# Altium PCB Power Board.PcbDoc
Units mil, origin at the board's own origin, x right, y up, seen from the top; angles counter-clockwise.
Board outline 3937.01 x 3937.01 mil, 4 copper layers (Top Layer, Ground Plane, Power Plane, Bottom Layer), stack 62.449 mil thick; 114 components, 37 nets, 342 pads, 320 vias.
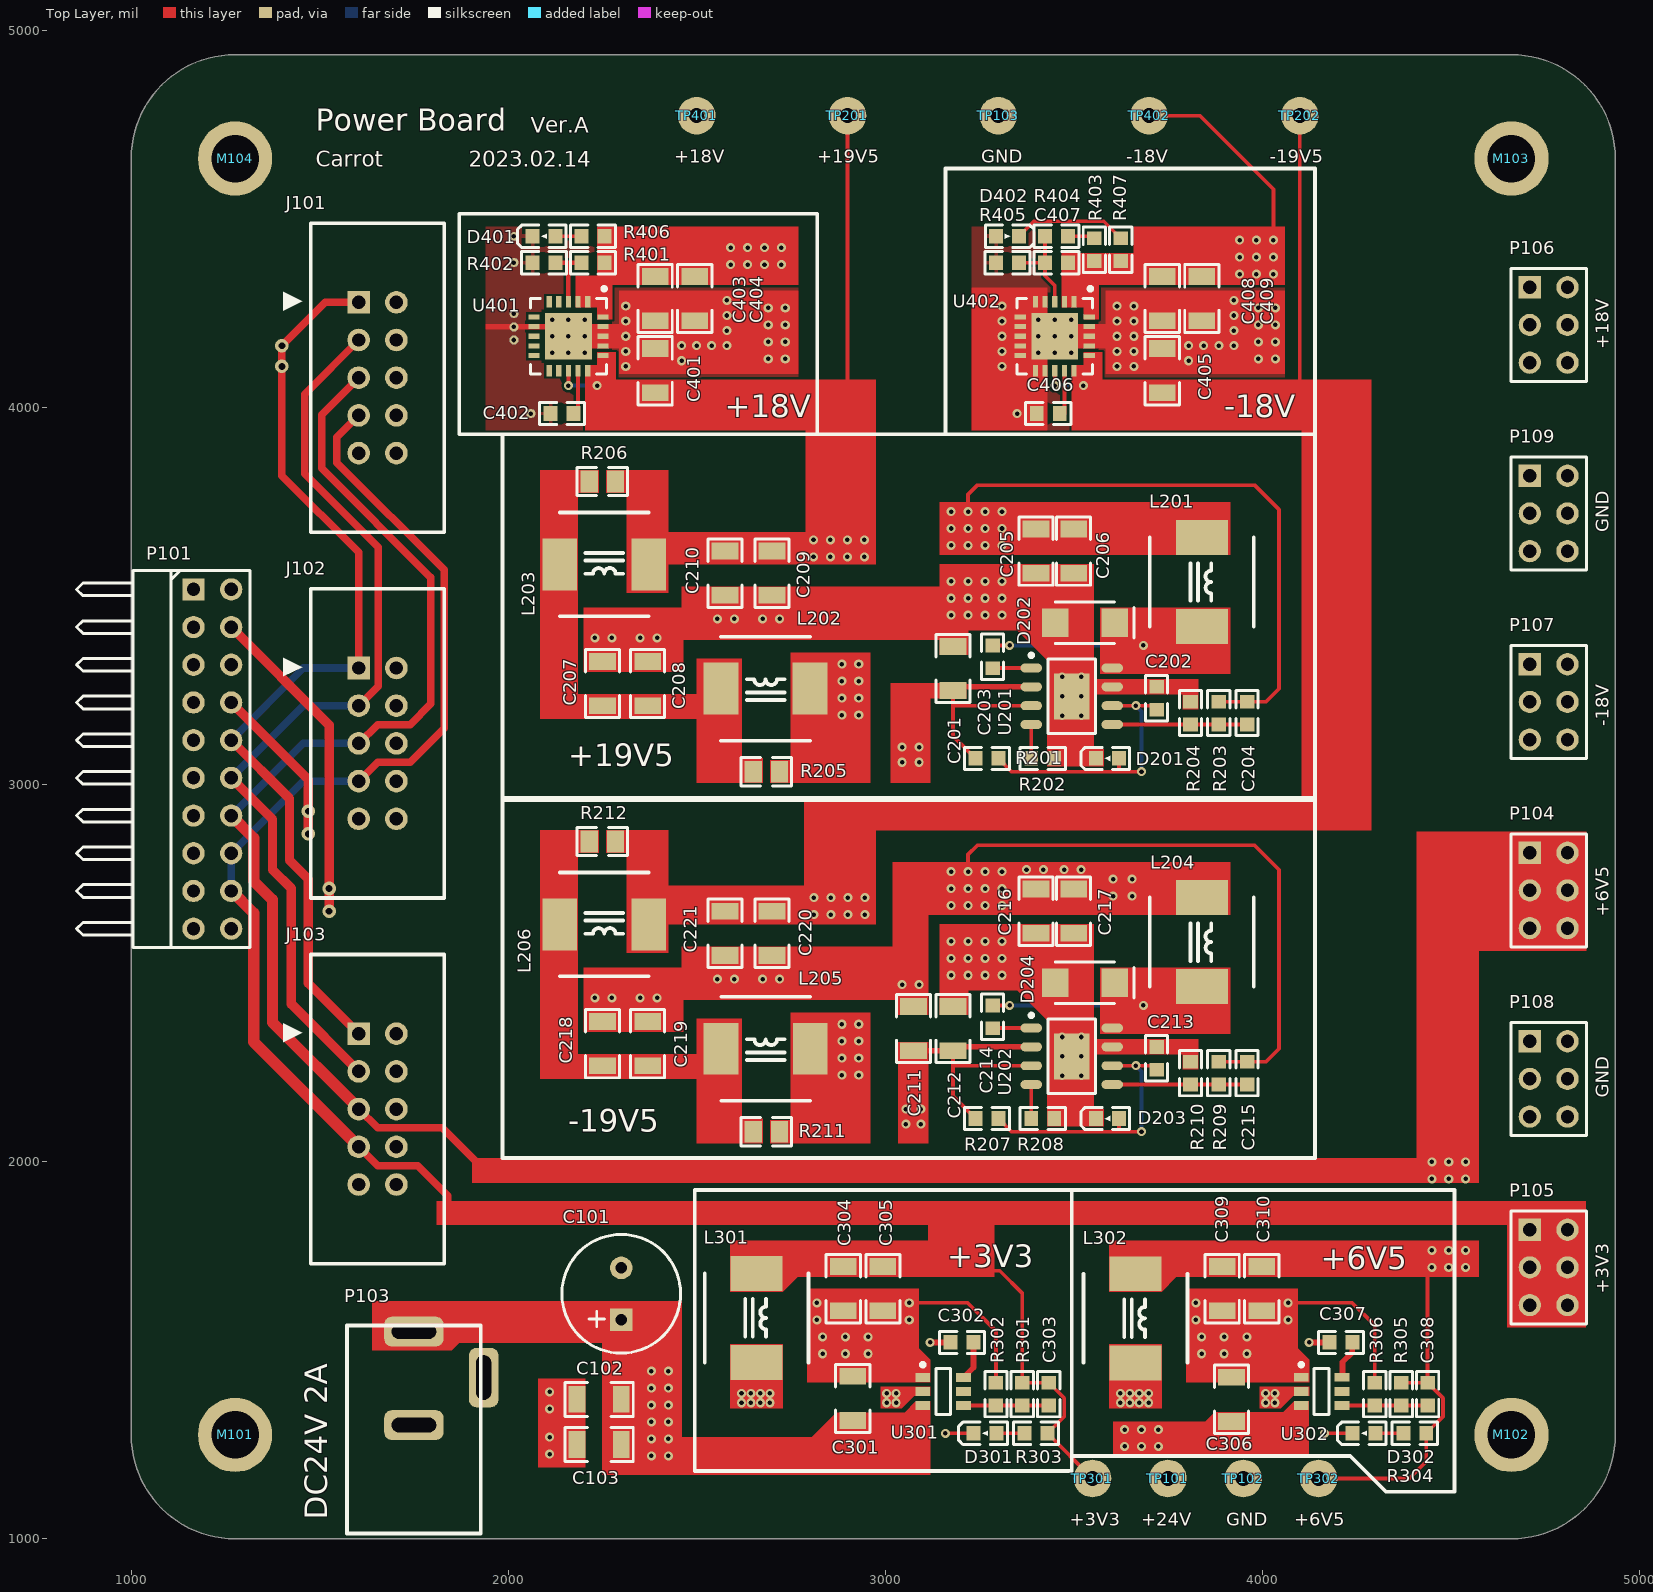
[diagram p0: Top Layer view]
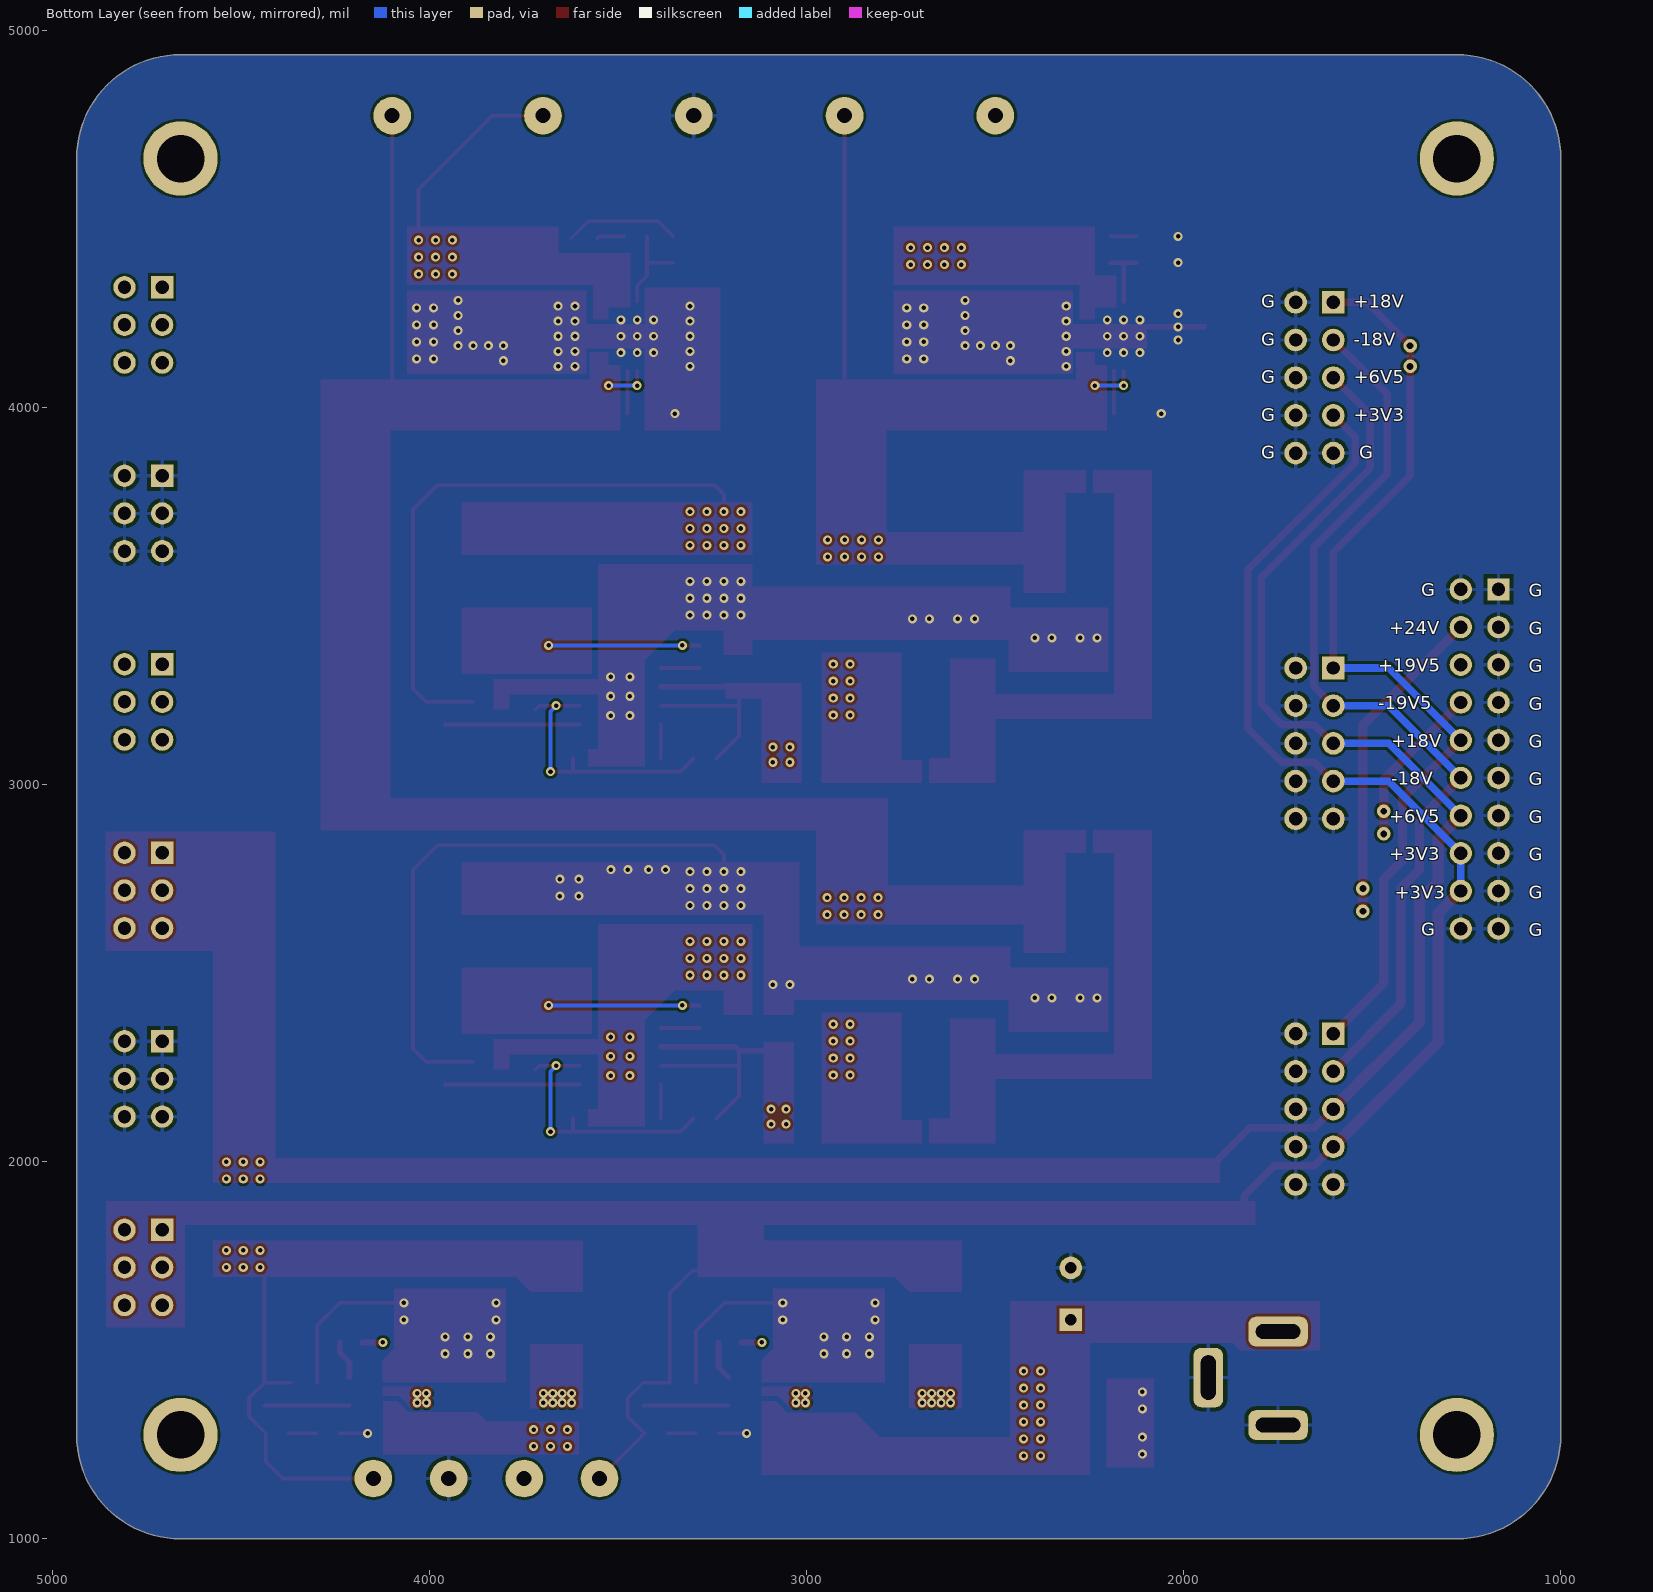
[diagram p1: Bottom Layer view, seen from below]
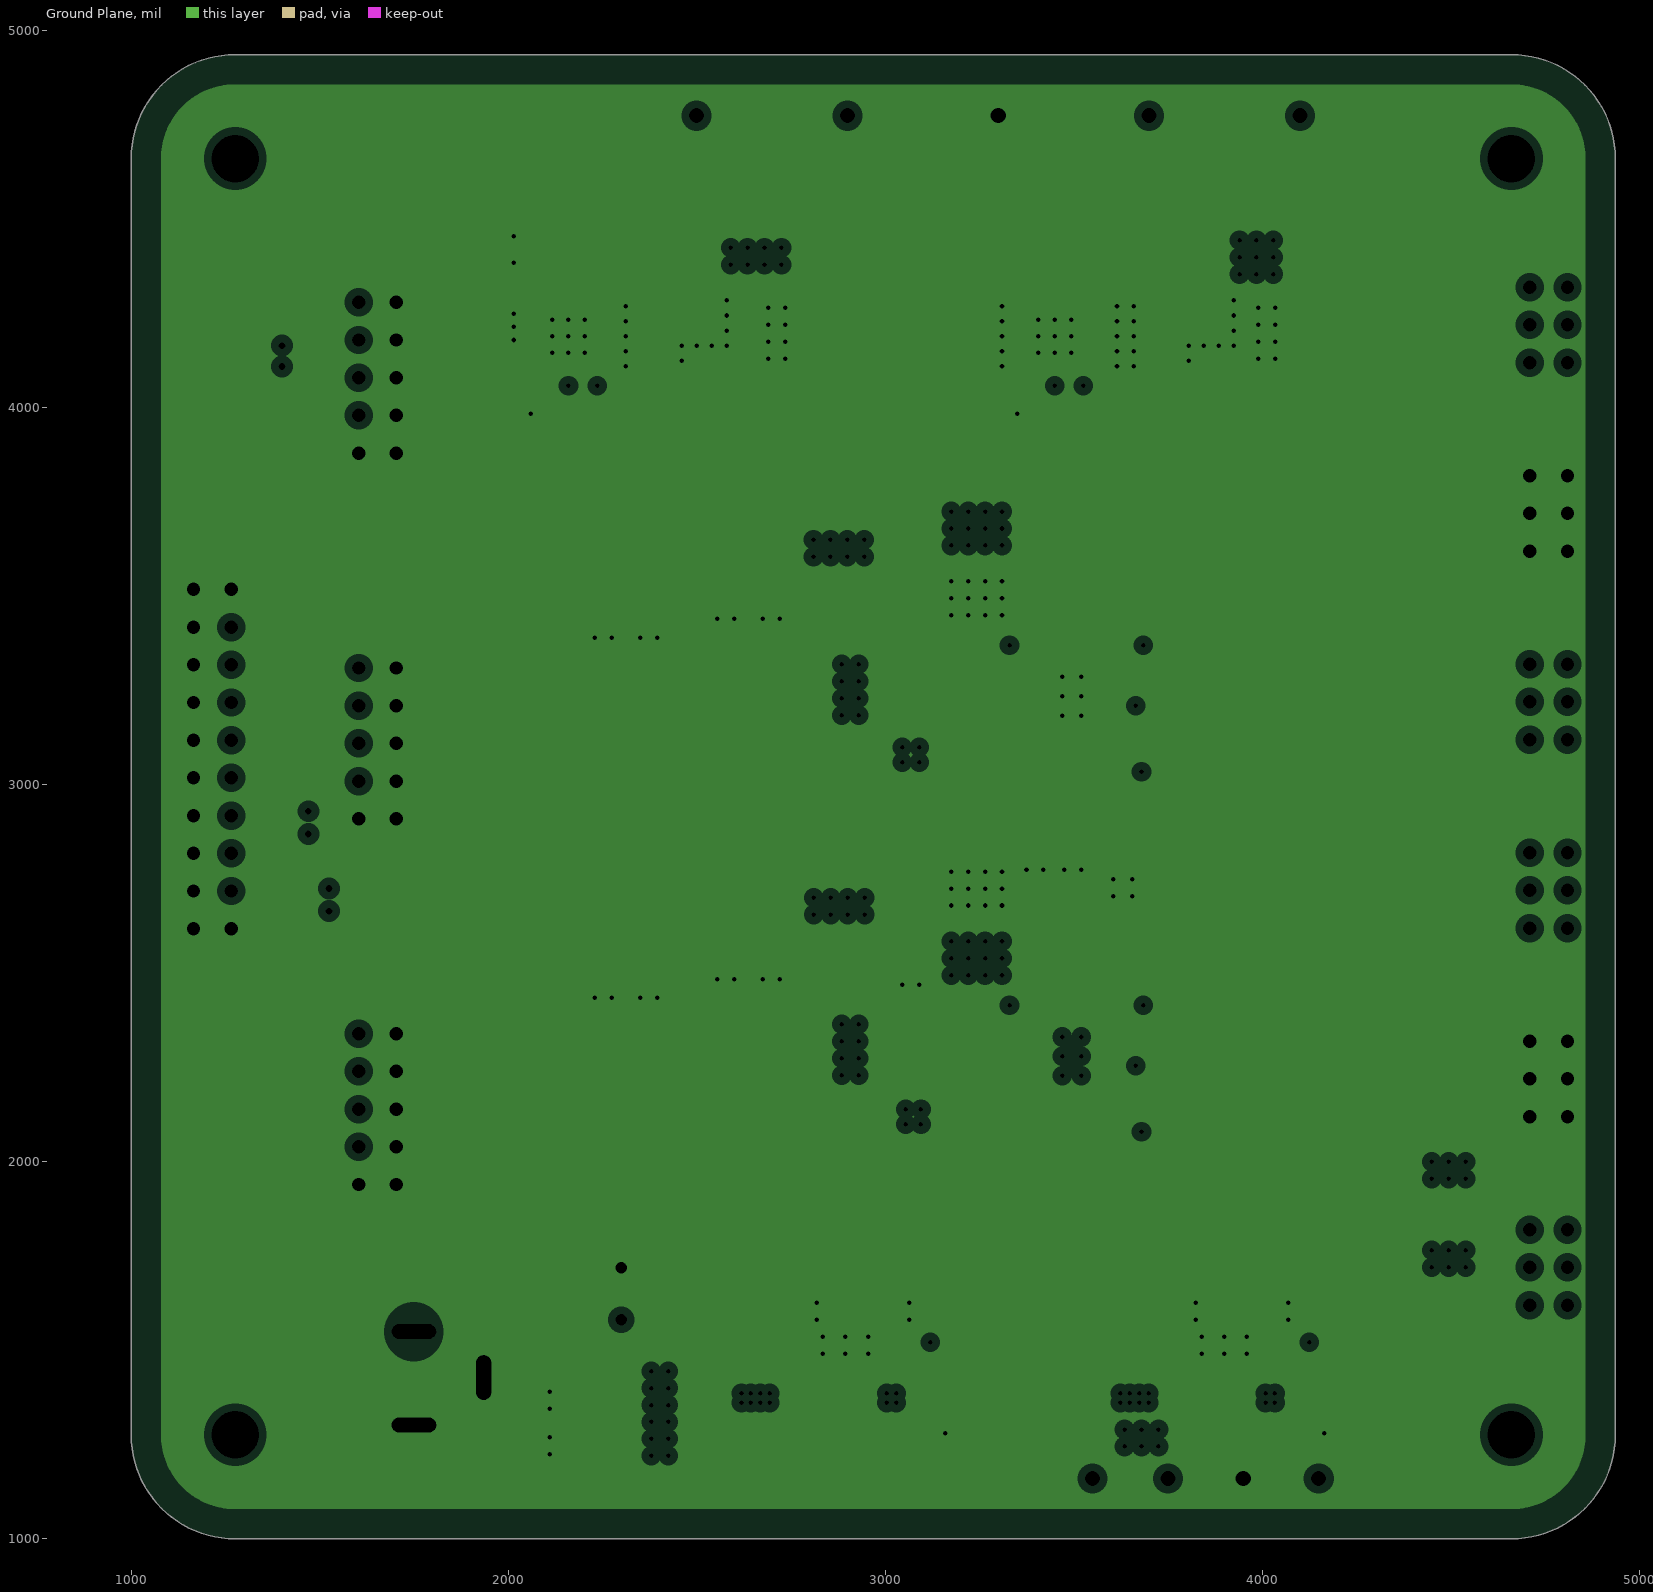
[diagram p2: Ground Plane, clearances drawn from the general rule]
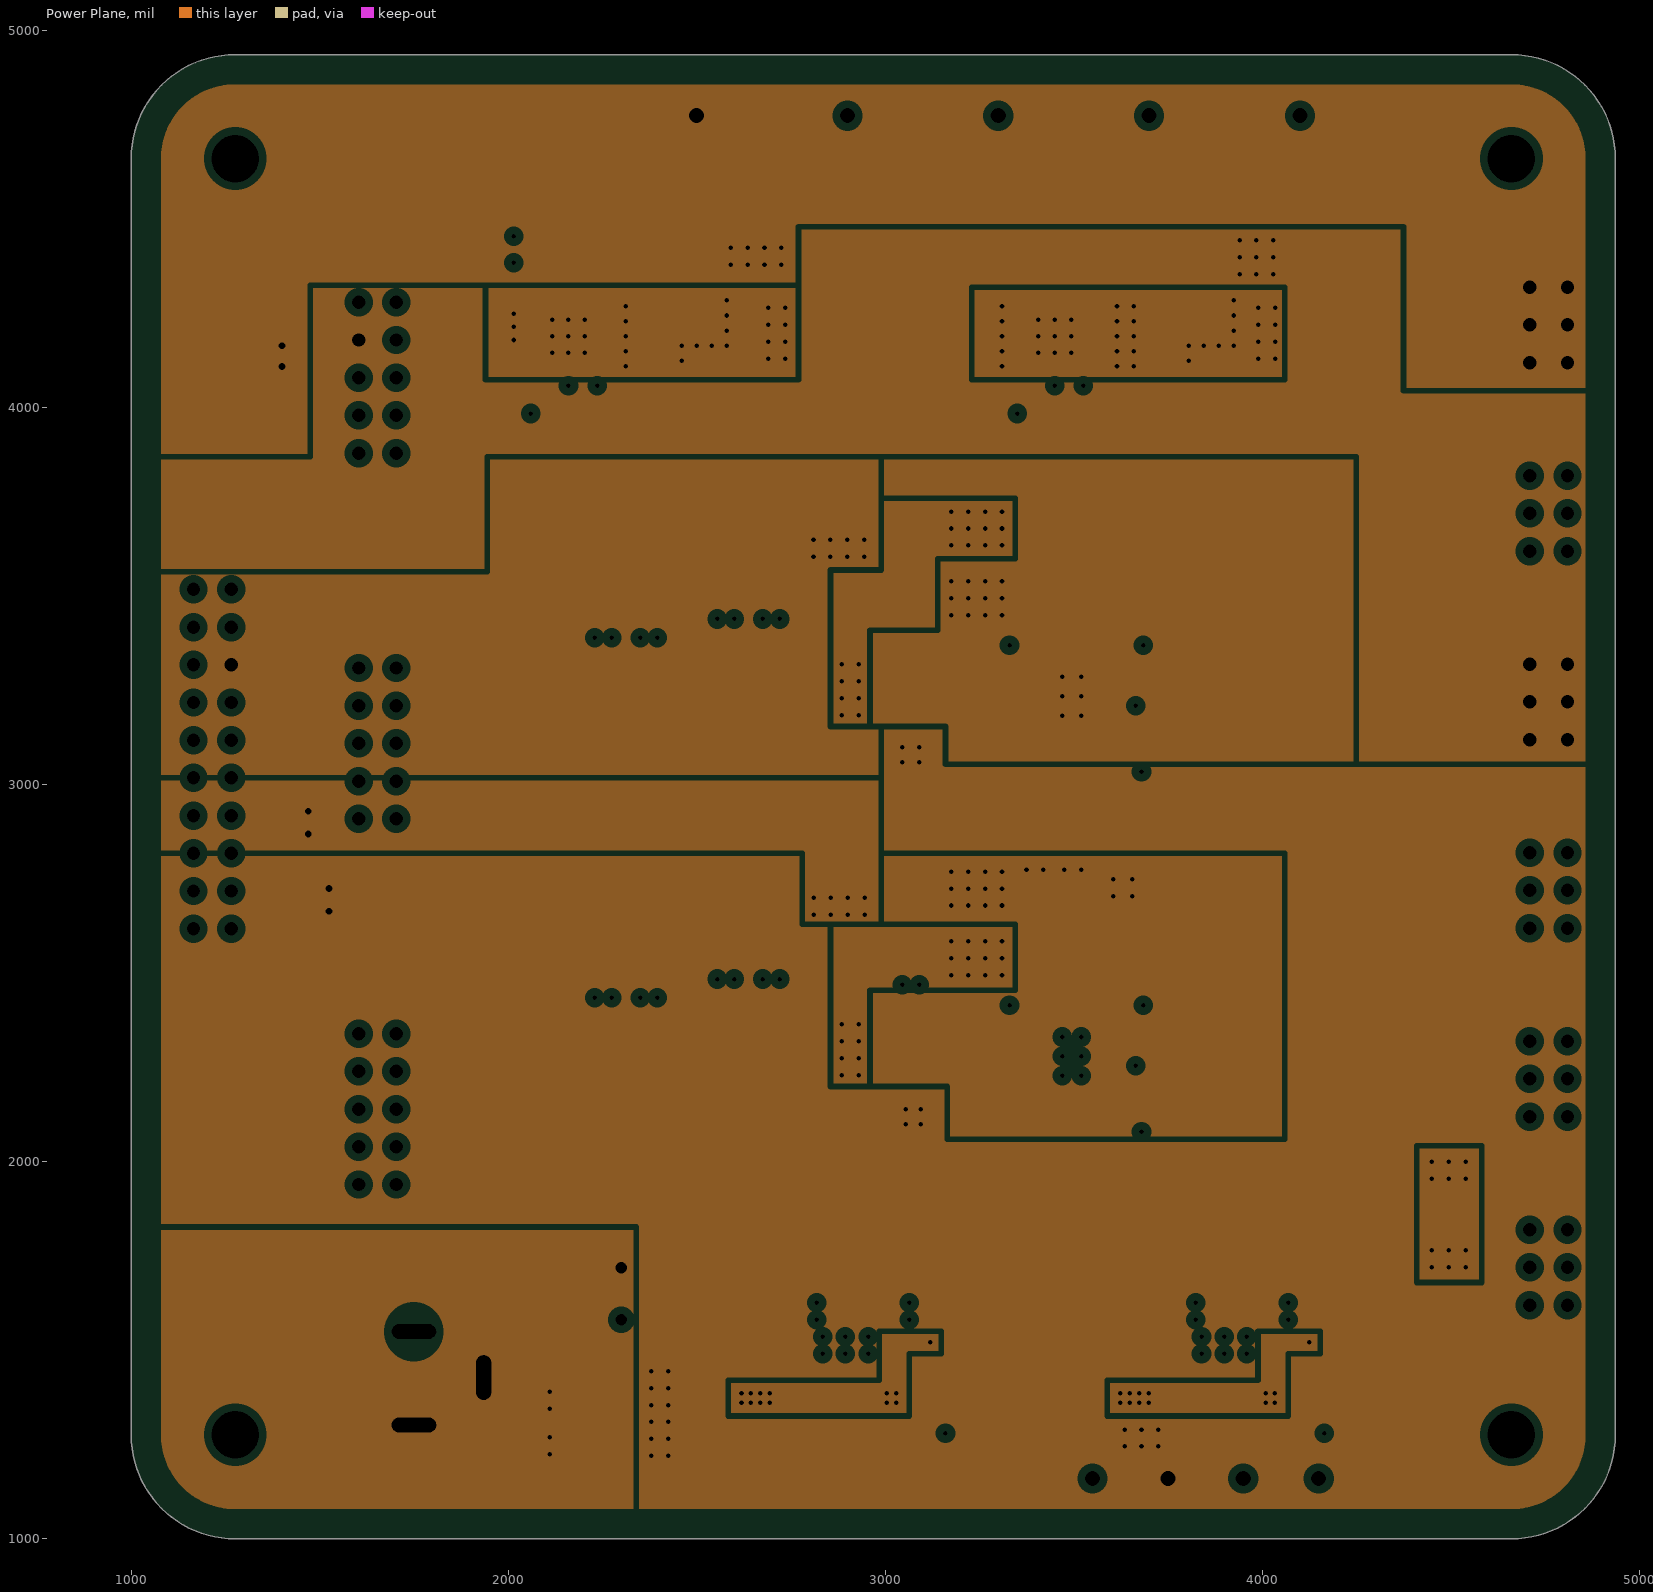
[diagram p3: Power Plane, clearances drawn from the general rule]
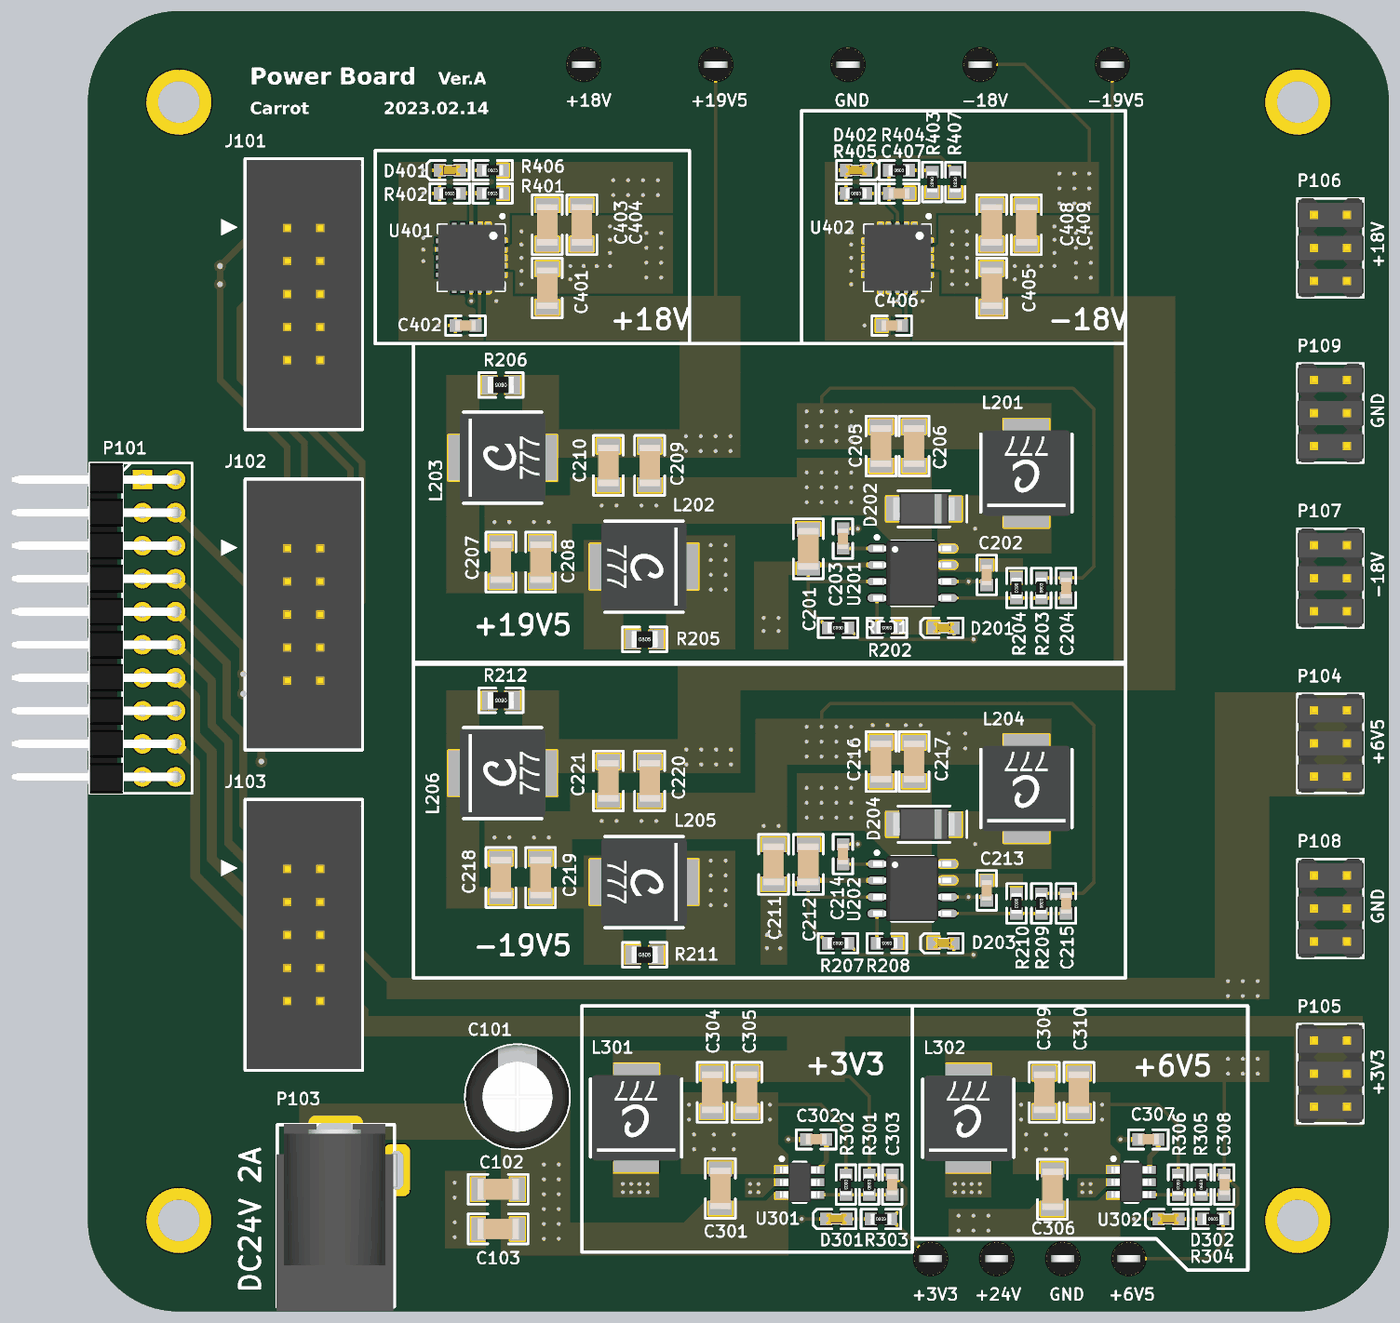
[diagram p4: 3D render of the assembled board from above, using the file's embedded part models]

## Layer stack, top to bottom
Top Solder: solder mask 0.5, Solder Resist, Dk 3.8
Top Layer: signal copper 1.378
Dielectric 1: prepreg 8.2835, 7628, Dk 4.5
Ground Plane: plane copper 0.5984, net GND
Dielectric 3: core 41.9291, FR-4, Dk 4.5
Power Plane: plane copper 0.5984, net (Multiple Nets)
Dielectric 4: prepreg 8.2835, 7628, Dk 4.5
Bottom Layer: signal copper 1.378
Bottom Solder: solder mask 0.5, Solder Resist, Dk 3.8

## Board outline
1000,1275.59 1000,4661.42 cw(c1275.59,4661.42) 1275.59,4937.01 4661.42,4937.01 cw(c4661.42,4661.42) 4937.01,4661.42 4937.01,1275.59 cw(c4661.42,1275.59) 4661.42,1000 1275.59,1000 cw(c1275.59,1275.59)

## Design rules (kind name [scope] priority, off if disabled: settings)
Clearance [All] p1: gap=7 ignorepadtopadclearanceinfootprint=FALSE
ComponentClearance [All] p1: gap=10 collisioncheckmode=3 verticalgap=10 showdistances=TRUE
Height [All] p1: minheight=0 maxheight=500 prefheight=500
HoleSize [All] p1: absolutevalues=TRUE maxlimit=10000 minlimit=10 maxpercent=80.000 minpercent=20.000
PlaneClearance [All] p1: clearance=20
PlaneConnect [All] p1: pad.planeconnectstyle=Relief pad.reliefexpansion=20 pad.reliefentries=4 pad.reliefconductorwidth=10 pad.reliefairgap=10 via.planeconnectstyle=Direct via.reliefexpansion=20 via.reliefentries=4 via.reliefconductorwidth=10 via.reliefairgap=10
PolygonConnect [All] p1: thpad.connectstyle=Relief thpad.reliefconductorwidth=10 thpad.reliefentries=4 thpad.polygonreliefangle="90 Angle" thpad.airgapwidth=10 smdpad.connectstyle=Relief smdpad.reliefconductorwidth=10 smdpad.reliefentries=4 smdpad.polygonreliefangle="90 Angle" smdpad.airgapwidth=10 via.connectstyle=Direct via.reliefconductorwidth=10 via.reliefentries=4 via.polygonreliefangle="90 Angle" via.airgapwidth=10
RoutingVias [All] p1: holewidth=12 width=24 viastyle="Through Hole" minholewidth=12 minwidth=24 maxholewidth=28 maxwidth=50
SolderMaskExpansion [All] p1: expansion=4
Width [All] p1: maxlimit=100 minlimit=7 preferedwidth=10
25 further rules are at their usual default settings.

## Classes and differential pairs
component class "Power Board.DCDC2": C301 C302 C303 C304 C305 C306 C307 C308 C309 C310 D301 D302 L301 L302 R301 R302 R303 R304 R305 R306 TP301 TP302 U301 U302
component class "Power Board.DCDC1": C201 C202 C203 C204 C205 C206 C207 C208 C209 C210 C211 C212 C213 C214 C215 C216 C217 C218 C219 C220 C221 D201 D202 D203 D204 L201 L202 L203 L204 L205 L206 R201 R202 R203 R204 R205 R206 R207 R208 R209 R210 R211 R212 TP201 TP202 U201 U202
component class "Power Board.DCIN": C101 C102 C103 J101 J102 J103 M101 M102 M103 M104 P101 P103 P104 P105 P106 P107 P108 P109 TP101 TP102 TP103
component class "Power Board.LDO": C401 C402 C403 C404 C405 C406 C407 C408 C409 D401 D402 R401 R402 R403 R404 R405 R406 R407 TP401 TP402 U401 U402

## Components (designator, comment, footprint, x,y, rotation, side; value= is the part's Value field where it differs from the comment)
C101 "Cap2" C8X12 2300,1650 r90 top value=220uf@35V
C102 "Cap" C1206 2241.34,1370 r0 top value=10uf@50V
C103 "Cap" C1206 2241.34,1250 r0 top value=10uf@50V
C201 "Cap" C1206 3180,3308.66 r270 top value=10uf@50V
C202 "Cap" C0603 3720,3229.68 r270 top value=NC
C203 "Cap" C0603 3285,3339.68 r270 top value=100nf
C204 "Cap" C0603 3960,3190.32 r270 top value=10pf
C205 "Cap" C1206 3400,3620 r90 top value=10uf@50V
C206 "Cap" C1206 3500,3620 r90 top value=10uf@50V
C207 "Cap" C1206 2250,3268.66 r270 top value=10uf@50V
C208 "Cap" C1206 2370,3268.66 r270 top value=10uf@50V
C209 "Cap" C1206 2700,3561.34 r90 top value=10uf@50V
C210 "Cap" C1206 2575,3561.34 r90 top value=10uf@50V
C211 "Cap" C1206 3075,2353.66 r270 top value=10uf@50V
C212 "Cap" C1206 3180,2353.66 r270 top value=10uf@50V
C213 "Cap" C0603 3720,2274.69 r270 top value=NC
C214 "Cap" C0603 3285,2384.69 r270 top value=100nf
C215 "Cap" C0603 3960,2235.32 r270 top value=10pf
C216 "Cap" C1206 3400,2665 r90 top value=10uf@50V
C217 "Cap" C1206 3500,2665 r90 top value=10uf@50V
C218 "Cap" C1206 2250,2313.66 r90 top value=10uf@50V
C219 "Cap" C1206 2370,2313.66 r90 top value=10uf@50V
C220 "Cap" C1206 2700,2606.34 r270 top value=10uf@50V
C221 "Cap" C1206 2575,2606.34 r270 top value=10uf@50V
C301 "Cap" C1206 2914,1372.34 r270 top value=10uf@50V
C302 "Cap" C0603 3204,1521 r0 top value=100nf
C303 "Cap" C0603 3434,1383.91 r270 top value=47pf
C304 "Cap" C1206 2889,1663.56 r90 top value=22uf@10V
C305 "Cap" C1206 2994,1663.56 r90 top value=22uf@10V
C306 "Cap" C1206 3919,1370 r270 top value=10uf@50V
C307 "Cap" C0603 4209,1521 r0 top value=100nf
C308 "Cap" C0603 4439,1383.91 r270 top value=100pf
C309 "Cap" C1206 3894,1663.56 r90 top value=47uf@10V
C310 "Cap" C1206 3999,1663.56 r90 top value=47uf@10V
C401 "Cap" C1206 2390,4098.46 r270 top value=10uf@50V
C402 "Cap" C0603 2142.69,3985 r180 top value=1uf
C403 "Cap" C1206 2390,4290 r90 top value=10uf@50V
C404 "Cap" C1206 2495,4290 r90 top value=10uf@50V
C405 "Cap" C1206 3735,4098.47 r270 top value=10uf@50V
C406 "Cap" C0603 3432.68,3985 r180 top value=1uf
C407 "Cap" C0603 3454.68,4385 r0 top value=10nf
C408 "Cap" C1206 3735,4290 r90 top value=10uf@50V
C409 "Cap" C1206 3840,4290 r90 top value=10uf@50V
D201 "LED" LED0603 3589.69,3070 r180 top value=RED
D202 "Diode" DIODE-SMAF 3530,3430 r180 top value=ST36F
D203 "LED" LED0603 3589.69,2115 r180 top value=RED
D204 "Diode" DIODE-SMAF 3530,2475 r180 top value=ST36F
D301 "LED" LED0603 3265,1280 r180 top value=RED
D302 "LED" LED0603 4270,1280 r180 top value=RED
D401 "LED" LED0603 2095,4455 r180 top value=RED
D402 "LED" LED0603 3324.68,4455 r0 top value=RED
J101 "DC3-10P" DC3-10P 1653.54,4080 r0 top locked
J102 "DC3-10P" DC3-10P 1653.54,3110 r0 top locked
J103 "DC3-10P" DC3-10P 1653.54,2140 r0 top locked
L201 "Inductor Iron" L06063 3839.99,3538.11 r90 top value=2.2uH@8A
L202 "Inductor Iron" L06063 2682.96,3255 r180 top value=2.2uH@8A
L203 "Inductor Iron" L06063 2255,3585 r0 top value=2.2uH@8A
L204 "Inductor Iron" L06063 3839.99,2583.11 r90 top value=6.8uH@4.5A
L205 "Inductor Iron" L06063 2683.11,2299.99 r180 top value=2.2uH@8A
L206 "Inductor Iron" L06063 2255,2630 r0 top value=2.2uH@8A
L301 "Inductor Iron" L06063 2659,1586 r90 top value=6.8uH@4.5A
L302 "Inductor Iron" L06063 3664,1585 r90 top value=10uH@4A
M101 "M3" M3-3.2X5 1275.59,1275.59 r0 top
M102 "M3" M3-3.2X5 4661.42,1275.59 r0 top
M103 "M3" M3-3.2X5 4661.42,4661.42 r0 top
M104 "M3" M3-3.2X5 1275.59,4661.42 r0 top
P101 "Header 10X2L" HDR2X10LML 1165.35,3518.5 r0 top locked
P103 "DC-005" DC-005 1750,1290 r270 top
P104 "Header 3X2" HDR2X3 4710,2820 r0 top
P105 "Header 3X2" HDR2X3 4710,1820 r0 top
P106 "Header 3X2" HDR2X3 4710,4320 r0 top
P107 "Header 3X2" HDR2X3 4710,3320 r0 top
P108 "Header 3X2" HDR2X3 4710,2320 r0 top
P109 "Header 3X2" HDR2X3 4710,3820 r0 top
R201 "Res" R0603 3270,3070 r180 top value=47K@1%
R202 "Res" R0603 3418.03,3070 r180 top value=12K@1%
R203 "Res" R0603 3885,3190.32 r90 top value=300K@1%
R204 "Res" R0603 3810,3190.32 r270 top value=12K@1%
R205 "Res" R0805 2685,3035 r0 top value=NC
R206 "Res" R0805 2250,3805 r180 top value=NC
R207 "Res" R0603 3270,2115 r180 top value=82K@1%
R208 "Res" R0603 3418.03,2115 r180 top value=12K@1%
R209 "Res" R0603 3885,2235.31 r90 top value=300K@1%
R210 "Res" R0603 3810,2235.32 r270 top value=12K@1%
R211 "Res" R0805 2685,2080 r0 top value=NC
R212 "Res" R0805 2250,2850 r180 top value=NC
R301 "Res" R0603 3364,1383.91 r90 top value=100K@1%
R302 "Res" R0603 3294,1383.91 r270 top value=22K@1%
R303 "Res" R0603 3400,1280 r0 top value=3.3K@1%
R304 "Res" R0603 4405,1280 r0 top value=10K@1%
R305 "Res" R0603 4369,1383.91 r90 top value=100K@1%
R306 "Res" R0603 4299,1383.91 r270 top value=10K@1%
R401 "Res" R0603 2225,4385 r0 top value=130K@1%
R402 "Res" R0603 2095,4385 r0 top value=11K@1%
R403 "Res" R0603 3555,4419.69 r270 top value=220K@1%
R404 "Res" R0603 3454.68,4455 r0 top value=1.5M@1%
R405 "Res" R0603 3324.68,4385 r0 top value=120K@1%
R406 "Res" R0603 2225,4455 r0 top value=33K@1%
R407 "Res" R0603 3625,4419.69 r270 top value=33K@1%
TP101 "TestPoint" TestPoint-THM1.0-L 3750,1160 r0 top
TP102 "TestPoint" TestPoint-THM1.0-L 3950,1160 r0 top
TP103 "TestPoint" TestPoint-THM1.0-L 3300,4775 r0 top
TP201 "TestPoint" TestPoint-THM1.0-L 2900,4775 r0 top
TP202 "TestPoint" TestPoint-THM1.0-L 4100,4775 r0 top
TP301 "TestPoint" TestPoint-THM1.0-L 3550,1160 r0 top
TP302 "TestPoint" TestPoint-THM1.0-L 4150,1160 r0 top
TP401 "TestPoint" TestPoint-THM1.0-L 2500,4775 r0 top
TP402 "TestPoint" TestPoint-THM1.0-L 3700,4775 r0 top
U201 "LMR16030P" LMR16030-SOIC8 3495,3235 r0 top
U202 "LMR16030P" LMR16030-SOIC8 3495,2280 r0 top
U301 "TPS54302" TPS54302-SOT23-6 3154,1391 r0 top
U302 "TPS54302" TPS54302-SOT23-6 4157.74,1391.26 r0 top
U401 "TPS7A4701" TPS7A4701-QFN20 2160,4190 r270 top
U402 "TPS7A3301" TPS7A3301-QFN20 3450,4190 r270 top

## Footprints (in the part's own frame and the unit in brackets; to place one, negate y for a bottom-side part, rotate by r counter-clockwise, add the part's x,y. Pads: shape width x height; smd on the part's side, far side on the other; paste and mask are expansions set on the pad)
C8X12 [mil] "Cap2,D=8,d=0.5,F=3.5,L=12"
  rect 60x60 hole 30: 1(-68.9,0.01)
  round 60 hole 30: 2(68.9,0.01)
  silkscreen extent -157,-157 157,157, body extent -157,-157 158,157, height 486
C0603 [mm] "Chip Capacitor, 2-Leads, Body 1.60x0.81mm, IPC Medium Density"
  rect 0.93x0.98 smd: 1(-0.77,0) 2(0.77,0)
  silkscreen extent -1.52,-0.75 1.52,0.75, body extent -0.8,-0.4 0.8,0.4, height 0.78
C1206 [mm] "Chip Capacitor, 2-Leads, Body 3.20x1.60mm, IPC Medium Density"
  rect 1.13x1.8 smd: 1(-1.49,0) 2(1.49,0)
  silkscreen extent -2.3,-1.15 2.3,1.15, body extent -1.6,-0.8 1.6,0.8, height 0.77
DC3-10P [mil]
  rect 60x60 hole 35.43: 1(-50,200)
  round 60 hole 35.43: 2(50,200) 3(-50,100) 4(50,100) 5(-50,0) 6(50,0) 7(-50,-100) 8(50,-100) 9(-50,-200) 10(50,-200)
  silkscreen extent -250,-410 177,410, body extent -173,-406 173,406, height 358
DC-005 [mm]
  rrect50% 2x4 hole 1 slot 3 at 90 deg: 1(-6.6,0) 2(-0.3,0)
  rrect50% 4x2 hole 1 slot 3 at 0 deg: 2(-3.5,4.7)
  silkscreen extent -7,-4.5 7,4.5, body extent -7.07,-4.57 7.33,4.73, height 11.05
DIODE-SMAF [mm] "SMAF; 2 C-Bend Leads; Body 5.0 x 2.7 mm, inc. leads (LxW)"
  rect 1.8x1.9 smd: 1(2,0) 2(-2,0)
  silkscreen extent -3.3,-1.4 2,1.4, body extent -2.35,-1.25 2.35,1.25, height 1
HDR2X3 [mm] "Connector; Male Header; 2x3 Position"
  rect 1.5x1.5 hole 0.9: 1(0,0)
  round 1.5 hole 0.9: 2(2.54,0) 3(0,-2.54) 4(2.54,-2.54) 5(0,-5.08) 6(2.54,-5.08)
  silkscreen extent -1.27,-6.35 3.81,1.27, body extent -1.27,-6.35 3.81,1.27, height 9.5
HDR2X10LML [mm] "Connector; Header; 10x2 Position; Right Angle; Male; Pin 1 on Left;"
  rect 1.5x1.5 hole 0.9: 1(0,0)
  round 1.5 hole 0.9: 2(2.54,0) 3(0,-2.54) 4(2.54,-2.54) 5(0,-5.08) 6(2.54,-5.08) 7(0,-7.62) 8(2.54,-7.62) 9(0,-10.16) 10(2.54,-10.16) 11(0,-12.7) 12(2.54,-12.7) 13(0,-15.24) 14(2.54,-15.24) 15(0,-17.78) 16(2.54,-17.78) 17(0,-20.32) 18(2.54,-20.32) 19(0,-22.86) 20(2.54,-22.86)
  silkscreen extent -7.87,-24.13 3.81,1.27, body extent -10.06,-24.13 2.83,1.27, height 1.22
L06063 [mm] "贴片功率电感 MHCI06030"
  rect 2.35x3.5 smd: 1(-3,0) 2(3,0)
  silkscreen extent -3,-3.5 3,3.5, body extent -3.28,-3.38 3.28,3.38, height 3
LED0603 [mm] "Chip LED, 2-Leads, Body 1.60x0.80mm, IPC Medium Density"
  rect 0.93x0.98 smd: 1(-0.77,0) 2(0.77,0)
  silkscreen extent -1.5,-0.75 1.78,0.75, body extent -0.8,-0.4 0.8,0.4, height 0.6
LMR16030-SOIC8 [mm] "SOIC, 8-Leads, Body 4.90x3.90mm, Pitch 1.27mm, Thermal Pad 3.10x2.40mm, IPC Medium Density"
  oval 1.45x0.6 smd: 1(-2.725,1.905) 2(-2.725,0.635) 3(-2.725,-0.635) 4(-2.725,-1.905) 5(2.725,-1.905) 6(2.725,-0.635) 7(2.725,0.635) 8(2.725,1.905)
  rect 2.4x3.1 smd: 9(0,0)
  Top Layer region: -1.475,-2.45 1.475,-2.45 1.475,2.45 -1.475,2.45
  silkscreen extent -2.85,-2.5 1.6,2.88, body extent -3,-2.5 3,2.5, height 1.7
M3-3.2X5 [mm]
  round 5 hole 3.2: ""(0,0)
R0603 [mm] "Chip Resistor, 2-Leads, Body 1.60x0.80mm, IPC Medium Density"
  rect 0.93x0.98 smd: 1(-0.77,0) 2(0.77,0)
  silkscreen extent -1.52,-0.75 1.52,0.75, body extent -0.8,-0.4 0.8,0.4, height 0.44
R0805 [mm] "Chip Resistor, 2-Leads, Body 2.00x1.25mm, IPC Medium Density"
  rect 1.16x1.47 smd: 1(-0.89,0) 2(0.89,0)
  silkscreen extent -1.7,-0.95 1.7,0.95, body extent -1,-0.62 1,0.63, height 0.59
TestPoint-THM1.0-L [mil]
  round 100 hole 40: 1(0,0)
  body extent -50,-50 50,50, height 180
TPS7A3301-QFN20 [mm] "PQFN, 20-Leads, Body 5.00x5.00mm, Pitch 0.65mm, Thermal Pad 3.15x3.15mm, IPC Medium Density"
  rect 0.75x0.35 smd: 1(-2.325,1.3) 2(-2.325,0.65) 3(-2.325,0) 4(-2.325,-0.65) 5(-2.325,-1.3) 11(2.325,-1.3) 12(2.325,-0.65) 13(2.325,0) 14(2.325,0.65) 15(2.325,1.3)
  rect 0.35x0.75 smd: 6(-1.3,-2.325) 7(-0.65,-2.325) 8(0,-2.325) 9(0.65,-2.325) 10(1.3,-2.325) 16(1.3,2.325) 17(0.65,2.325) 18(0,2.325) 19(-0.65,2.325) 20(-1.3,2.325)
  rect 3.15x3.15 smd: 21(0,0)
  silkscreen extent -3.32,-2.55 2.55,2.55, body extent -2.55,-2.55 2.55,2.55, height 1
TPS7A4701-QFN20 [mm] "PQFN, 20-Leads, Body 5.00x5.00mm, Pitch 0.65mm, Thermal Pad 3.15x3.15mm, IPC Medium Density"
  rect 0.75x0.35 smd: 1(-2.325,1.3) 2(-2.325,0.65) 3(-2.325,0) 4(-2.325,-0.65) 5(-2.325,-1.3) 11(2.325,-1.3) 12(2.325,-0.65) 13(2.325,0) 14(2.325,0.65) 15(2.325,1.3)
  rect 0.35x0.75 smd: 6(-1.3,-2.325) 7(-0.65,-2.325) 8(0,-2.325) 9(0.65,-2.325) 10(1.3,-2.325) 16(1.3,2.325) 17(0.65,2.325) 18(0,2.325) 19(-0.65,2.325) 20(-1.3,2.325)
  rect 3.15x3.15 smd: 21(0,0)
  silkscreen extent -3.32,-2.55 2.55,2.55, body extent -2.55,-2.55 2.55,2.55, height 1
TPS54302-SOT23-6 [mm] "SOT23, 6-Leads, Body 2.90x2.80mm, Pitch 0.95mm, IPC Medium Density"
  rect 1x0.6 smd: 1(-1.375,0.95) 2(-1.375,0) 3(-1.375,-0.95) 4(1.375,-0.95) 5(1.375,0) 6(1.375,0.95)
  silkscreen extent -1.5,-1.55 0.5,1.92, body extent -1.53,-1.53 1.53,1.53, height 1.1

## Part data
D202 D204: "通用二极管"
L201 L202 L203 L204 L205 L206 L301 L302: "Magnetic-Core Inductor"
P101: "Header, 10-Pin, Dual row, Pin 1 on Left"
P104 P105 P106 P107 P108 P109: "Header, 3-Pin, Dual row"
R201 R202 R203 R204 R205 R206 R207 R208 R209 R210 R211 R212 R301 R302 R303 R304 R305 R306 R401 R402 R403 R404 R405 R406 R407: "电阻"
TP101 TP102 TP103 TP201 TP202 TP301 TP302 TP401 TP402: "测试点"
U201 U202: "LMR16030 SIMPLE SWITCHER? 60-V, 3-A Step-Down Converter With 40-μA IQ"
U301 U302: "TPS54302 4.5-V to 28-V Input, 3-A Output, EMI-Friendly Synchronous Step-Down Converter"
U401: "TPS7A470x 36-V, 1-A, 4-μVRMS, RF LDO Voltage Regulator"
U402: "TPS7A33 –36-V, 1-A, Ultralow-Noise Negative Voltage Regulator"

## Via types
v1: diameter 24, hole 12, Top Layer to Bottom Layer, tented both sides, 284 vias
v2: diameter 23.62, hole 11.81, Top Layer to Bottom Layer, 18 vias
v3: diameter 24, hole 12, Top Layer to Bottom Layer, 12 vias
v4: diameter 36, hole 18, Top Layer to Bottom Layer, tented both sides, 6 vias

## Nets (pads, with @x,y where several pads share a name; then routed paths per layer and width w, separated by ;. In a path a pad name is that pad's centre, name@x,y a point inside that pad or via, vN(x,y) a via of type N, cw(c..) or ccw(c..) an arc to the next point about the centre after c; other vN are vias at no path point)
DC24V: C101.1 C102.2 C103.2 C201.2 C211.2 C212.2 C301.2 C306.2 P101.4 P103.1 R201.2 R207.2 TP101.1 U201.2 U201.3 U202.2 U202.3 U301.3 U302.3 | length 2214.6
  Top Layer w10: C212.2 3180,2255 ; C201.2 3180,3210 ; R207.2 3180,2174.68 3180,2255 ; R201.2 3180,3129.68 3180,3210 ; U202.3 3180,2255 ; U201.3 3180,3210
  Top Layer w15: C211.2 C212.2 3190,2305 U202.2 ; C201.2 3190,3260 U201.2
  Top Layer w25: P101.4 1525,3158.86 v4(1525,2725) v4(1525,2665)
  other v1: 2380,1220 2425,1220 3635,1245 3680,1245 3725,1245 2380,1265 2425,1265 3635,1290 3680,1290 3725,1290 2380,1310 2425,1310 2380,1355 2425,1355 2380,1400 2425,1400 2380,1445 2425,1445 3055,2100 3095,2100 3055,2140 3095,2140 3045,3060 3090,3060 3045,3100 3090,3100
DC+3V3: C303.1 C304.2 C305.2 J101.7 J102.7 J103.7 L301.2 P101.16 P101.18 P105.1 P105.2 P105.3 P105.4 P105.5 P105.6 R301.2 R303.2 TP301.1 | length 3790.7
  Top Layer w10: 3174,1711 3304,1711 3364,1651 R301.2 C303.1 3475,1373.23 3475,1324.68 R303.2 TP301.1@3550.32,1160
  Top Layer w20: J103.7 1653.54,1990 1760,1990 1840,1910 1840,1865 ; J102.7 1653.54,3060 1740,3060 1830,3150 1830,3570 1545,3855 1545,3921.46 J101.7
  Top Layer w30: P101.18@1265.35,2720 1325,2660.35 1325,2318.54 J103.7
  Bottom Layer w20: P101.18 P101.16 1456.85,3010 J102.7
DC+6V5: C308.1 C309.2 C310.2 J101.5 J102.5 J103.5 L302.2 P101.14 P104.1 P104.2 P104.3 P104.4 P104.5 P104.6 R304.2 R305.2 TP302.1 | length 3910.6
  Top Layer w10: TP302.1 4390,1160 4435.32,1205.32 R304.2 4480,1324.68 4480,1373.23 C308.1 ; R305.2 C308.1 ; 4439,1711 C308.1
  Top Layer w20: J103.5 1653.54,2090 1825,2090 1935,1980 ; J102.5 1653.54,3160 1740,3160 1795,3215 1795,3550 1505,3840 1505,3981.46 J101.5
  Top Layer w30: P101.14 1325,2858.86 1325,2745 1375,2695 1375,2370 J103.5@1605,2140
  Bottom Layer w20: P101.14 1456.85,3110 J102.5
  other v1: 4450,1720 4495,1720 4540,1720 4450,1765 4495,1765 4540,1765 4450,1955 4495,1955 4540,1955 4450,2000 4495,2000 4540,2000
DC+18V: C403.2 C404.2 J101.1 J102.1 J103.1 P101.10 P106.1 P106.2 P106.3 P106.4 P106.5 P106.6 R401.2 R406.2 TP401.1 U401.1 U401.2 U401.20 | length 2526.6
  Top Layer w20: J102.1 1603.54,3616.46 1400,3820 v4(1400,4110) v4(1400,4165) 1515,4280 J101.1
  Top Layer w25: P101.10 1420,2963.86 1420,2800 1470,2750 1470,2473.54 J103.1
  Bottom Layer w20: P101.10 1456.85,3310 J102.1
  other v1: 2590,4380 2635,4380 2680,4380 2725,4380 2590,4425 2635,4425 2680,4425 2725,4425
DC+19V5: C209.2 C210.2 C401.2 L203.2 P101.6 R206.1 TP201.1 U401.13 U401.15 U401.16 | length 1243.5
  Top Layer w10: v1@2160,4056 v1(2160,4059) U401.13 ; v1(2900,3650) TP201.1
  Bottom Layer w10: v1(2160,4059) v1(2236,4059)
  other v1: 2810,3605 2855,3605 2900,3605 2945,3605 2810,3650 2855,3650 2945,3650
DC-18V: C407.2 C408.2 C409.2 J101.3 J102.3 J103.3 P101.12 P107.1 P107.2 P107.3 P107.4 P107.5 P107.6 R403.2 R407.2 TP402.1 U402.1 U402.2 U402.20 | length 3013.4
  Top Layer w10: TP402.1 3835,4775 4030,4580 v1(4030,4445)
  Top Layer w20: J102.3 1655,3261.46 1655,3630 1460,3825 1460,4036.46 J101.3
  Top Layer w25: P101.12 1375,2908.86 1375,2775 1425,2725 1425,2418.54 J103.3
  Bottom Layer w20: P101.12 1456.85,3210 J102.3
  other v1: 3940,4355 3985,4355 4030,4355 3940,4400 3985,4400 4030,4400 3940,4445 3985,4445
DC-19V5: C220.1 C221.1 C405.2 L206.2 P101.8 R212.1 TP202.1 U402.13 U402.15 U402.16 | length 1651.8
  Top Layer w10: v1@3450,4056 v1(3450,4059) U402.13 ; C405.2 4099.8,4039.8 4100,4040 TP202.1
  Top Layer w25: P101.8 1470,3013.86 v4(1470,2930) v4(1470,2870)
  Bottom Layer w10: v1(3450,4059) v1(3526,4059)
  other v1: 2811,2656 2856,2656 2901,2656 2946,2656 2811,2701 2856,2701 2901,2701 2946,2701
GND: C101.2 C102.1 C103.1 C201.1 C202.1 C205.1 C206.1 C207.1 C208.1 C209.1 C210.1 C211.1 C215.1 C216.2 C217.2 C218.2 C219.2 C220.2 C221.2 C301.1 C304.1 C305.1 C306.1 C309.1 C310.1 C401.1 C402.2 C403.1 C404.1 C405.1 C406.2 C408.1 C409.1 D201.2 D202.1 D301.2 D302.2 D401.2 D402.1 J101.2 J101.4 J101.6 J101.8 J101.9 J101.10 J102.2 J102.4 J102.6 J102.8 J102.9 J102.10 J103.2 J103.4 J103.6 J103.8 J103.9 J103.10 L204.2 P101.1 P101.2 P101.3 P101.5 P101.7 P101.9 P101.11 P101.13 P101.15 P101.17 P101.19 P101.20 P103.2 P108.1 P108.2 P108.3 P108.4 P108.5 P108.6 P109.1 P109.2 P109.3 P109.4 P109.5 P109.6 R202.1 R204.1 R209.2 R302.1 R306.1 R402.1 R405.1 TP102.1 TP103.1 U201.7 U201.9 U301.1 U302.1 U401.7 U401.17 U401.18 U401.19 U401.21 U402.4 U402.5 U402.6 U402.7 U402.8 U402.9 U402.10 U402.11 U402.12 U402.17 U402.18 U402.19 U402.21 | length 2510.3
  Top Layer w10: v1(3064,1626) 3219,1626 3294,1551 R302.1 ; v1(3160,1280) D301.2 ; v1(3220,2770) 3220,2815 3245,2840 3980,2840 4045,2775 4045,2300 4010.63,2265.63 C215.1 R209.2 ; v1(4069,1626) 4239,1626 4299,1566 R306.1 ; v1(4165,1280) D302.2
  other v1: 2110,1225 2110,1270 2110,1345 2110,1390 2834.28,1491 2894.28,1491 2954.71,1491 3839.28,1491 3899.28,1491 3959.71,1491 2834.28,1536 2894.28,1536 2954.71,1536 3839.28,1536 3899.28,1536 3959.71,1536 2819,1581 3064,1581 3824,1581 4069,1581 2819,1626 3824,1626 2230,2435 2275,2435 2350,2435 2395,2435 3045,2470 3090,2470 2555,2485 2600,2485 2675,2485 2720,2485 3175,2680 3220,2680 3265,2680 3310,2680 3605,2705 3655,2705 3175,2725 3220,2725 3265,2725 3310,2725 3605,2750 3655,2750 3175,2770 3265,2770 3310,2770 3375,2775 3420,2775 3475,2775 3520,2775 2230,3390 2275,3390 2350,3390 2395,3390 2555,3440 2600,3440 2675,3440 2720,3440 3175,3450 3220,3450 3265,3450 3310,3450 3175,3495 3220,3495 3265,3495 3310,3495 3175,3540 3220,3540 3265,3540 3310,3540 2060,3985 3350,3985 2312,4110 3310,4110 3615,4110 3660,4110 2460,4125 3805,4125 2690,4130 2735,4130 3990,4130 4035,4130 2312,4150 3310,4150 3615,4150 3660,4150 2460,4165 2500,4165 2540,4165 2580,4165 3805,4165 3845,4165 3885,4165 3925,4165 2690,4175 2735,4175 3990,4175 4035,4175 2015,4180 2312,4190 3310,4190 3615,4190 3660,4190 2580,4205 3925,4205 2015,4215 2690,4220 2735,4220 3990,4220 4035,4220 2312,4230 3310,4230 3615,4230 3660,4230 2580,4245 3925,4245 2015,4250 2690,4265 2735,4265 3990,4265 4035,4265 2312,4270 3310,4270 3615,4270 3660,4270 2580,4285 3925,4285 2015,4385 2015,4455
  other v2: 2116.69,4146.69 2160,4146.69 2203.31,4146.69 3406.69,4146.69 3450,4146.69 3493.31,4146.69 2116.69,4190 2160,4190 2203.31,4190 3406.69,4190 3450,4190 3493.31,4190 2116.69,4233.31 2160,4233.31 2203.31,4233.31 3406.69,4233.31 3450,4233.31 3493.31,4233.31
  other v3: 3469.41,3183.82 3520.59,3183.82 3469.41,3235 3520.59,3235 3469.41,3286.18 3520.59,3286.18
NetC202_2: C202.2 D201.1 R201.1 U201.6 | length 732.5
  Top Layer w10: R201.1 3335.31,3035 3620,3035 ; U201.6 v1(3665,3210) 3709.37,3210 C202.2 ; D201.1 3620,3035 ; v1(3680,3035) 3620,3035
  Bottom Layer w10: v1(3665,3210) 3680,3195 v1(3680,3035)
NetC203_1: C203.1 D202.2 L201.1 U201.8 | length 400
  Top Layer w10: C203.1 v1(3330,3370)
  Bottom Layer w10: v1(3330,3370) v1(3685,3370)
NetC203_2: C203.2 U201.1 | length 103
  Top Layer w10: C203.2 3285.63,3310 U201.1
NetC204_1: C204.1 C205.2 C206.2 L201.2 L202.1 R203.2 R205.2 | length 1556.5
  Top Layer w10: v1(3220,3725) 3220,3770 3245,3795 3980,3795 4045,3730 4045,3255 4010.63,3220.63 R203.2
  other v1: 2885,3185 2930,3185 2885,3230 2930,3230 2885,3275 2930,3275 2885,3320 2930,3320 3175,3635 3220,3635 3265,3635 3310,3635 3175,3680 3220,3680 3265,3680 3310,3680 3175,3725 3265,3725 3310,3725
NetC204_2: C204.2 R203.1 R204.2 U201.5 | length 357.7
  Top Layer w10: U201.5 C204.2
NetC207_2: C207.2 C208.2 L202.2 L203.1 R205.1 R206.2
NetC212_1: C212.1 C213.1 C216.1 C217.1 D203.2 D204.1 L205.1 R208.1 R210.1 R211.2 U202.7 U202.9
  other v1: 2885,2230 2930,2230 2885,2275 2930,2275 2885,2320 2930,2320 2885,2365 2930,2365 3175,2495 3220,2495 3265,2495 3310,2495 3175,2540 3220,2540 3265,2540 3310,2540 3175,2585 3220,2585 3265,2585 3310,2585
  other v3: 3469.41,2228.82 3520.59,2228.82 3469.41,2280 3520.59,2280 3469.41,2331.18 3520.59,2331.18
NetC213_2: C213.2 D203.1 R207.1 U202.6 | length 732.5
  Top Layer w10: R207.1 3335.31,2080 3620,2080 ; U202.6 v1(3665,2255) 3709.37,2255 C213.2 ; D203.1 3620,2080 ; v1(3680,2080) 3620,2080
  Bottom Layer w10: v1(3665,2255) 3680,2240 v1(3680,2080)
NetC214_1: C214.1 D204.2 L204.1 U202.8 | length 400
  Top Layer w10: C214.1 v1(3330,2415)
  Bottom Layer w10: v1(3330,2415) v1(3685,2415)
NetC214_2: C214.2 U202.1 | length 103
  Top Layer w10: C214.2 3285.63,2355 U202.1
NetC215_2: C215.2 R209.1 R210.2 U202.5 | length 357.7
  Top Layer w10: U202.5 R210.2 R209.1 C215.2
NetC218_1: C218.1 C219.1 L205.2 L206.1 R211.1 R212.2
NetC302_1: C302.1 L301.1 U301.2 | length 54.1
  Top Layer w15: v1(3119.55,1521) C302.1
  other v1: 2618.99,1361 2643.99,1361 2668.99,1361 2693.99,1361 3004,1361 3029,1361 2618.99,1386 2643.99,1386 2668.99,1386 2693.99,1386 3004,1386 3029,1386
NetC302_2: C302.2 U301.6 | length 103.4
  Top Layer w15: U301.6 3234.32,1454.58 C302.2
NetC303_2: C303.2 R301.1 R302.2 U301.4 | length 225.9
  Top Layer w10: U301.4 R302.2 R301.1 C303.2
NetC307_1: C307.1 L302.1 U302.2 | length 54.1
  Top Layer w15: v1(4124.55,1521) C307.1
  other v1: 3623.99,1361 3648.99,1361 3673.99,1361 3698.99,1361 4009,1361 4034,1361 3623.99,1386 3648.99,1386 3673.99,1386 3698.99,1386 4009,1386 4034,1386
NetC307_2: C307.2 U302.6 | length 103.4
  Top Layer w15: U302.6@4213.13,1428.4 4213.13,1468.86 4239.32,1495.04 C307.2
NetC308_2: C308.2 R305.1 R306.2 U302.4 | length 225.9
  Top Layer w10: U302.4@4213.13,1353.6 R306.2 C308.2
NetC402_1: C402.1 U401.14 | length 113.5
  Top Layer w10: C402.1@2185.59,3985 U401.14
NetC406_1: C406.1 U402.14 | length 113.5
  Top Layer w10: C406.1@3475.59,3985 U402.14
NetC407_1: C407.1 R404.1 R405.2 U402.3 | length 253.5
  Top Layer w10: R405.2 C407.1 ; R404.1 C407.1 ; U402.3 3450,4325 3424.37,4350.63 C407.1
NetD301_1: D301.1 R303.1 | length 74.4
  Top Layer w10: D301.1 R303.1
NetD302_1: D302.1 R304.1 | length 74.4
  Top Layer w10: D302.1 R304.1
NetD401_1: D401.1 R406.1 | length 69.4
  Top Layer w10: D401.1 R406.1
NetD402_2: D402.2 R407.1 | length 305.2
  Top Layer w10: D402.2 3395,4495 3580,4495 R407.1
NetR202_2: R202.2 U201.4 | length 90
  Top Layer w10: R202.2 U201.4
NetR208_2: R208.2 U202.4 | length 90
  Top Layer w10: R208.2 U202.4
NetR401_1: R401.1 R402.2 U401.3 | length 172.8
  Top Layer w12: R402.2 2160,4385 ; U401.3 2160,4385 ; R401.1 2160,4385
NetR403_1: R403.1 R404.2 | length 72.1
  Top Layer w10: R404.2 3550,4455 R403.1
pads on no net: M101. M102. M103. M104. U301.5 U302.5 U401.4 U401.5 U401.6 U401.8 U401.9 U401.10 U401.11 U401.12

## Polygon pours and split planes (outlines as drawn)
GND on Top Layer "GND_L01_P001" (solid, remove dead copper, pour order 1): 1940,3940 1940,4480 2770,4480 2770,3940
GND on Top Layer "GND_L01_P005" (solid, remove dead copper, pour order 5): 3230,3940 3230,4480 4060,4480 4060,3940
GND on Bottom Layer "GND_L04_P007" (solid, remove dead copper, pour order 7): 1275.59,1000 cw(c1275.59,1275.59) 1000,1275.59 1000,4661.42 cw(c1275.59,4661.42) 1275.59,4937.01 4661.42,4937.01 cw(c4661.42,4661.42) 4937.01,4661.42 4937.01,1275.59 cw(c4661.42,1275.59) 4661.42,1000
GND on Ground Plane (split plane): 4673.3,4857.9 4685.14,4856.82 4696.9,4855.03 4708.52,4852.54 4719.98,4849.34 4731.22,4845.47 4742.2,4840.92 4752.89,4835.71 4763.25,4829.87 4773.24,4823.41 4782.81,4816.37 4791.95,4808.75 4800.6,4800.6 4808.75,4791.95 4816.37,4782.81 4823.41,4773.24 4829.87,4763.25 4835.71,4752.89 4840.92,4742.2 4845.47,4731.22 4849.34,4719.98 4852.54,4708.52 4855.03,4696.9 4856.82,4685.14 4857.9,4673.3 4858.23,4662.49 4858.17,4661.42 4858.17,1275.59 4858.23,1274.52 4857.9,1263.71 4856.82,1251.86 4855.03,1240.11 4852.54,1228.48 4849.34,1217.03 4845.47,1205.79 4840.92,1194.8 4835.71,1184.11 4829.87,1173.76 4823.41,1163.77 4816.37,1154.2 4808.75,1145.06 4800.6,1136.4 4791.95,1128.25 4782.81,1120.64 4773.24,1113.59 4763.25,1107.14 4752.89,1101.3 4742.2,1096.09 4731.22,1091.54 4719.98,1087.66 4708.52,1084.47 4696.9,1081.97 4685.14,1080.19 4673.3,1079.11 4662.49,1078.78 4661.42,1078.84 1275.59,1078.84 1274.52,1078.78 1263.71,1079.11 1251.86,1080.19 1240.11,1081.97 1228.48,1084.47 1217.03,1087.66 1205.79,1091.54 1194.8,1096.09 1184.11,1101.3 1173.76,1107.14 1163.77,1113.59 1154.2,1120.64 1145.06,1128.25 1136.4,1136.4 1128.25,1145.06 1120.64,1154.2 1113.59,1163.77 1107.14,1173.76 1101.3,1184.11 1096.09,1194.8 1091.54,1205.79 1087.66,1217.03 1084.47,1228.48 1081.97,1240.11 1080.19,1251.86 1079.11,1263.71 1078.78,1274.52 1078.84,1275.59 1078.84,4661.42 1078.78,4662.49 1079.11,4673.3 1080.19,4685.14 1081.97,4696.9 1084.47,4708.52 1087.66,4719.98 1091.54,4731.22 1096.09,4742.2 1101.3,4752.89 1107.14,4763.25 1113.59,4773.24 1120.64,4782.81 1128.25,4791.95 1136.4,4800.6 1145.06,4808.75 1154.2,4816.37 1163.77,4823.41 1173.76,4829.87 1184.11,4835.71 1194.8,4840.92 1205.79,4845.47 1217.03,4849.34 1228.48,4852.54 1240.11,4855.03 1251.86,4856.82 1263.71,4857.9 1274.52,4858.23 1275.59,4858.17 4661.42,4858.17 4662.49,4858.23
GND on Power Plane (split plane): 4052.44,4082.56 3237.56,4082.56 3237.56,4312.44 4052.44,4312.44
GND on Power Plane (split plane): 4242.44,3062.56 3167.56,3062.56 3167.56,3155 3167.31,3156.96 3166.55,3158.78 3165.35,3160.35 3163.78,3161.55 3161.96,3162.31 3160,3162.56 2967.56,3162.56 2967.56,3402.44 3140,3402.44 3141.96,3402.69 3143.78,3403.45 3145.35,3404.65 3146.55,3406.22 3147.31,3408.04 3147.56,3410 3147.56,3592.44 3345,3592.44 3346.96,3592.69 3348.78,3593.45 3350.35,3594.65 3351.55,3596.22 3352.31,3598.04 3352.56,3600 3352.56,3760 3352.31,3761.96 3351.55,3763.78 3350.35,3765.35 3348.78,3766.55 3346.96,3767.31 3345,3767.56 2997.56,3767.56 2997.56,3862.44 4242.44,3862.44
NetC204_1 on Power Plane (split plane): 3337.44,3607.56 3140,3607.56 3138.04,3607.31 3136.22,3606.55 3134.65,3605.35 3133.45,3603.78 3132.69,3601.96 3132.44,3600 3132.44,3417.56 2960,3417.56 2958.04,3417.31 2956.22,3416.55 2954.65,3415.35 2953.45,3413.78 2952.69,3411.96 2952.44,3410 2952.44,3162.56 2862.56,3162.56 2862.56,3562.44 2990,3562.44 2991.96,3562.69 2993.78,3563.45 2995.35,3564.65 2996.55,3566.22 2997.31,3568.04 2997.56,3570 2997.56,3752.44 3337.44,3752.44
NetC212_1 on Power Plane (split plane): 3337.44,2462.56 2960,2462.56 2958.04,2462.31 2956.22,2461.55 2954.65,2460.35 2953.45,2458.78 2952.69,2456.96 2952.44,2455 2952.44,2207.56 2862.56,2207.56 2862.56,2622.44 3337.44,2622.44
DC+6V5 on Power Plane (split plane): 4574.57,1687.56 4417.48,1687.56 4417.48,2034.74 4574.57,2034.74
NetC307_1 on Power Plane (split plane): 4146.44,1498.56 4069,1498.56 4067.04,1498.31 4065.22,1497.55 4063.65,1496.35 4062.45,1494.78 4061.69,1492.96 4061.44,1491 4061.44,1333.56 3596.56,1333.56 3596.56,1413.44 3989,1413.44 3990.96,1413.69 3992.78,1414.45 3994.35,1415.65 3995.55,1417.22 3996.31,1419.04 3996.56,1421 3996.56,1543.44 4146.44,1543.44
GND on Power Plane (split plane): 4052.44,2067.56 3172.56,2067.56 3172.56,2200 3172.31,2201.96 3171.55,2203.78 3170.35,2205.35 3168.78,2206.55 3166.96,2207.31 3165,2207.56 2967.56,2207.56 2967.56,2447.44 3345,2447.44 3346.96,2447.69 3348.78,2448.45 3350.35,2449.65 3351.55,2451.22 3352.31,2453.04 3352.56,2455 3352.56,2630 3352.31,2631.96 3351.55,2633.78 3350.35,2635.35 3348.78,2636.55 3346.96,2637.31 3345,2637.56 2997.18,2637.56 2997.18,2810.94 4052.44,2810.94
NetC302_1 on Power Plane (split plane): 3141.44,1498.56 3064,1498.56 3062.04,1498.31 3060.22,1497.55 3058.65,1496.35 3057.45,1494.78 3056.69,1492.96 3056.44,1491 3056.44,1333.56 2591.56,1333.56 2591.56,1413.44 2984,1413.44 2985.96,1413.69 2987.78,1414.45 2989.35,1415.65 2990.55,1417.22 2991.31,1419.04 2991.56,1421 2991.56,1543.44 3141.44,1543.44
DC+18V on Power Plane (split plane): 4673.3,4857.9 4685.14,4856.82 4696.9,4855.03 4708.52,4852.54 4719.98,4849.34 4731.22,4845.47 4742.2,4840.92 4752.89,4835.71 4763.25,4829.87 4773.24,4823.41 4782.81,4816.37 4791.95,4808.75 4800.6,4800.6 4808.75,4791.95 4816.37,4782.81 4823.41,4773.24 4829.87,4763.25 4835.71,4752.89 4840.92,4742.2 4845.47,4731.22 4849.34,4719.98 4852.54,4708.52 4855.03,4696.9 4856.82,4685.14 4857.9,4673.3 4858.23,4662.49 4858.17,4661.42 4858.17,4052.56 4382.56,4052.56 4382.56,4480 4382.31,4481.96 4381.55,4483.78 4380.35,4485.35 4378.78,4486.55 4376.96,4487.31 4375,4487.56 2770,4487.56 2768.04,4487.31 2766.22,4486.55 2764.65,4485.35 2763.45,4483.78 2762.69,4481.96 2762.44,4480 2762.44,4332.56 1475,4332.56 1473.04,4332.31 1471.22,4331.55 1469.65,4330.35 1468.45,4328.78 1467.69,4326.96 1467.44,4325 1467.44,3877.56 1078.84,3877.56 1078.84,4661.42 1078.78,4662.49 1079.11,4673.3 1080.19,4685.14 1081.97,4696.9 1084.47,4708.52 1087.66,4719.98 1091.54,4731.22 1096.09,4742.2 1101.3,4752.89 1107.14,4763.25 1113.59,4773.24 1120.64,4782.81 1128.25,4791.95 1136.4,4800.6 1145.06,4808.75 1154.2,4816.37 1163.77,4823.41 1173.76,4829.87 1184.11,4835.71 1194.8,4840.92 1205.79,4845.47 1217.03,4849.34 1228.48,4852.54 1240.11,4855.03 1251.86,4856.82 1263.71,4857.9 1274.52,4858.23 1275.59,4858.17 4661.42,4858.17 4662.49,4858.23
DC-18V on Power Plane (split plane): 4367.44,4045 4367.69,4043.04 4368.45,4041.22 4369.65,4039.65 4371.22,4038.45 4373.04,4037.69 4375,4037.44 4858.17,4037.44 4858.17,3062.56 4257.56,3062.56 4257.56,3870 4257.31,3871.96 4256.55,3873.78 4255.35,3875.35 4253.78,3876.55 4251.96,3877.31 4250,3877.56 1945,3877.56 1943.04,3877.31 1941.22,3876.55 1939.65,3875.35 1938.45,3873.78 1937.69,3871.96 1937.44,3870 1937.44,3572.56 1078.84,3572.56 1078.84,3862.44 1475,3862.44 1476.96,3862.69 1478.78,3863.45 1480.35,3864.65 1481.55,3866.22 1482.31,3868.04 1482.56,3870 1482.56,4317.44 1932.44,4317.44 1932.44,4075 1932.69,4073.04 1933.45,4071.22 1934.65,4069.65 1936.22,4068.45 1938.04,4067.69 1940,4067.44 2770,4067.44 2771.96,4067.69 2773.78,4068.45 2775.35,4069.65 2776.55,4071.22 2777.31,4073.04 2777.56,4075 2777.56,4325 2777.56,4472.44 4367.44,4472.44
GND on Power Plane (split plane): 2762.44,4082.56 1947.56,4082.56 1947.56,4317.44 2762.44,4317.44
DC+19V5 on Power Plane (split plane): 2982.44,3760 2982.44,3577.56 2855,3577.56 2853.04,3577.31 2851.22,3576.55 2849.65,3575.35 2848.45,3573.78 2847.69,3571.96 2847.44,3570 2847.44,3155 2847.69,3153.04 2848.45,3151.22 2849.65,3149.65 2851.22,3148.45 2853.04,3147.69 2855,3147.44 2982.05,3147.44 2982.05,3026.07 1078.84,3026.07 1078.84,3557.44 1945,3557.44 1946.96,3557.69 1948.78,3558.45 1950.35,3559.65 1951.55,3561.22 1952.31,3563.04 1952.56,3565 1952.56,3862.44 2982.44,3862.44
DC24V on Power Plane (split plane): 3152.44,3055 3152.69,3053.04 3153.45,3051.22 3154.65,3049.65 3156.22,3048.45 3158.04,3047.69 3160,3047.44 4858.17,3047.44 4858.17,1275.59 4858.23,1274.52 4857.9,1263.71 4856.82,1251.86 4855.03,1240.11 4852.54,1228.48 4849.34,1217.03 4845.47,1205.79 4840.92,1194.8 4835.71,1184.11 4829.87,1173.76 4823.41,1163.77 4816.37,1154.2 4808.75,1145.06 4800.6,1136.4 4791.95,1128.25 4782.81,1120.64 4773.24,1113.59 4763.25,1107.14 4752.89,1101.3 4742.2,1096.09 4731.22,1091.54 4719.98,1087.66 4708.52,1084.47 4696.9,1081.97 4685.14,1080.19 4673.3,1079.11 4662.49,1078.78 4661.42,1078.84 2347.56,1078.84 2347.56,1827 2347.31,1828.96 2346.55,1830.78 2345.35,1832.35 2343.78,1833.55 2341.96,1834.31 2340,1834.56 1078.84,1834.56 1078.84,2810.94 2772.44,2810.94 2772.44,2630 2772.69,2628.04 2773.45,2626.22 2774.65,2624.65 2776.22,2623.45 2778.04,2622.69 2780,2622.44 2847.44,2622.44 2847.44,2200 2847.69,2198.04 2848.45,2196.22 2849.65,2194.65 2851.22,2193.45 2853.04,2192.69 2855,2192.44 3157.44,2192.44 3157.44,2060 3157.69,2058.04 3158.45,2056.22 3159.65,2054.65 3161.22,2053.45 3163.04,2052.69 3165,2052.44 4060,2052.44 4061.96,2052.69 4063.78,2053.45 4065.35,2054.65 4066.55,2056.22 4067.31,2058.04 4067.56,2060 4067.56,2818.5 4067.31,2820.46 4066.55,2822.29 4065.35,2823.85 4063.78,2825.06 4061.96,2825.81 4060,2826.07 2997.18,2826.07 2997.18,3147.44 3152.44,3147.44
DC-19V5 on Power Plane (split plane): 2982.05,2637.56 2787.56,2637.56 2787.56,2818.5 2787.31,2820.46 2786.55,2822.29 2785.35,2823.85 2783.78,2825.06 2781.96,2825.81 2780,2826.07 1078.84,2826.07 1078.84,3010.94 2982.05,3010.94
GND on Power Plane (split plane): 2332.44,1078.84 1275.59,1078.84 1274.52,1078.78 1263.71,1079.11 1251.86,1080.19 1240.11,1081.97 1228.48,1084.47 1217.03,1087.66 1205.79,1091.54 1194.8,1096.09 1184.11,1101.3 1173.76,1107.14 1163.77,1113.59 1154.2,1120.64 1145.06,1128.25 1136.4,1136.4 1128.25,1145.06 1120.64,1154.2 1113.59,1163.77 1107.14,1173.76 1101.3,1184.11 1096.09,1194.8 1091.54,1205.79 1087.66,1217.03 1084.47,1228.48 1081.97,1240.11 1080.19,1251.86 1079.11,1263.71 1078.78,1274.52 1078.84,1275.59 1078.84,1819.44 2332.44,1819.44

## Other copper
Top Layer:
  region net DC+3V3: 1810,1895 4858,1895 4858,1561 4650,1561 4650,1833 1810,1833
  region net GND: 2205,1425 2080,1425 2080,1190 2205,1190
  region net DC24V: 2340,1270 2805,1270 2870,1335 3051.66,1335 3081.66,1365 3120,1365 3120,1170 2340,1170
  region net NetC302_1: 2989,1346 2989,1402.81 3119.55,1402.81 3119.55,1379.66 3077.66,1379.66 3044,1346
  region net NetC302_1: 2589,1516 2589,1346 2729,1346 2729,1516
  region net DC+3V3: 2589,1791 3115,1791 3115,1895 3290,1895 3290,1694.62 2767.62,1694.62 2729,1656 2589,1656
  region net GND: 3119.55,1416 3119.55,1475.45 3089,1506 3089,1663.56 2794,1663.56 2794,1416
  region net NetC214_1: 3570,2340 3915,2340 3915,2515 3570,2515
  region net NetC212_1: 3830,2245 3790,2245 3790,2285 3553.07,2285 3553.07,2139.37 3580,2139.37 3580,2095 3430,2095 3430,2375 3350,2455 3220,2455 3220,2390 3145,2390 3145,2630 3553.07,2630 3553.07,2325 3830,2325
  region net GND: 3115,2390 3035,2390 3035,2430 2465,2430 2465,2345 2200,2345 2200,2515 2460,2515 2460,2570 3020,2570 3020,2795 3915,2795 3915,2655 3115,2655
  region net NetC212_1: 2960,2395 2750,2395 2750,2110 2695,2110 2695,2050 2960,2050
  region net NetC218_1: 2185,2285 2500,2285 2500,2380 2620,2380 2620,2115 2675,2115 2675,2050 2500,2050 2500,2220 2085,2220 2085,2880 2185,2880 2240,2880 2240,2820 2185,2820
  region net DC-19V5: 2260,2880 2260,2820 2315,2820 2315,2555 2425,2555 2425,2629.99 2975,2629.99 2975,2732 2425,2732 2425,2880
  region net DC+19V5: 2260,3835 2260,3775 2315,3775 2315,3510 2425,3510 2425,3584.99 2975,3584.99 2975,3670 2425,3670 2425,3835
  region net NetC207_2: 2185,3240 2500,3240 2500,3335 2620,3335 2620,3070 2675,3070 2675,3005 2500,3005 2500,3175 2085,3175 2085,3835 2185,3835 2240,3835 2240,3775 2185,3775
  region net NetC204_1: 2960,3350 2750,3350 2750,3065 2695,3065 2695,3005 2960,3005
  region net NetC204_1: 3145,3610 3145,3750 3915,3750 3915,3610
  region net GND: 3830,3200 3790,3200 3790,3240 3553.07,3240 3553.07,3094.37 3580,3094.37 3580,3050 3430,3050 3430,3330 3350,3410 3220,3410 3220,3345 3145,3345 3145,3385 3035,3385 2465,3385 2465,3300 2200,3300 2200,3470 2460,3470 2460,3525 3020,3525 3145,3525 3145,3585 3553.07,3585 3553.07,3280 3830,3280
  region net NetC203_1: 3570,3295 3915,3295 3915,3470 3570,3470
  region net DC+18V: 2179,4267 2179,4350 2236,4350 2236,4480 2770,4480 2770,4326 2276,4326 2276,4235 2237,4235 2237,4267
  region net DC+19V5: 2205,4113 2205,3940 2770,3940 2770,4074 2286,4074 2286,4147 2237,4147 2237,4113
  region net GND: 1940,4222 2295,4222 2295,4310 2770,4310 2770,4090 2295,4090 2295,4158 2099,4158 2099,4209 1940,4209
  region net GND: 3230,4318 3430,4318 3430,4222 3585,4222 3585,4310 4060,4310 4060,4090 3585,4090 3585,4158 3430,4158 3430,3940 3230,3940
  region net DC-19V5: 3495,4113 3495,3940 4060,3940 4060,4074 3576,4074 3576,4147 3527,4147 3527,4113
  region net DC-18V: 3469,4267 3469,4410 3660,4410 3660,4480 4060,4480 4060,4326 3566,4326 3566,4235 3527,4235 3527,4267
  region net DC24V: 1640,1500 1850,1500 1870,1520 2250,1520 2250,1170 2460,1170 2460,1630 1640,1630
  region net DC24V: 3035,2317 3115,2317 3115,2050 3035,2050
  region net DC24V: 3215,3270 3015,3270 3015,3005 3120,3005 3120,3230 3215,3230
  region net DC-19V5: 2785,2630 2785,2965 4105,2965 4105,3940 3870,3940 3870,4074 4289,4074 4290,4075 4290,2880 2975,2880 2975,2630
  region net DC+19V5: 2515,4075 2975,4075 2975,3585 2790,3585 2790,3940 2515,3940
  region net GND: 4124.55,1416 4124.55,1475.45 4094,1506 4094,1663.56 3799,1663.56 3799,1416
  region net DC+6V5: 3594,1791 4120,1791 4575,1791 4575,1694.62 3772.62,1694.62 3734,1656 3594,1656
  region net NetC307_1: 3594,1516 3594,1346 3734,1346 3734,1516
  region net NetC307_1: 3994,1346 3994,1402.81 4124.55,1402.81 4124.55,1379.66 4082.66,1379.66 4049,1346
  region net DC+6V5: 1905,2010 4575,2010 4575,1945 4466,1945 1905,1945
  region net DC+6V5: 4410,2875 4410,1945 4575,1945 4575,2560 4860,2560 4860,2875
  region net DC24V: 3605,1310 3848.48,1310 3873.74,1335.26 4055.4,1335.26 4085.4,1365.26 4123.74,1365.26 4123.74,1225 3605,1225
Ground Plane (plane layer: these items are gaps in the copper):
  pour cut-out: 3469.41,2331.18 3469.41,2228.82 3520.59,2228.82 3520.59,2331.18
  pour cut-out: 2380,1220 2425,1220 2425,1445 2380,1445
  pour cut-out: 3940,4445 3940,4355 4030,4355 4030,4445
  pour cut-out: 2590,4425 2590,4380 2725,4380 2725,4425
  pour cut-out: 3175,3725 3175,3635 3310,3635 3310,3725
  pour cut-out: 2810,3650 2810,3605 2945,3605 2945,3650
  pour cut-out: 2930,3320 2885,3320 2885,3185 2930,3185
  pour cut-out: 2811,2701 2811,2655 2946,2655 2946,2701
  pour cut-out: 2930,2365 2885,2365 2885,2230 2930,2230
  pour cut-out: 3175,2585 3175,2495 3310,2495 3310,2585
  pour cut-out: 4450,1955 4540,1955 4540,2000 4450,2000
  pour cut-out: 4450,1720 4540,1720 4540,1765 4450,1765
  pour cut-out: 3635,1245 3725,1245 3725,1290 3635,1290
Power Plane (plane layer: these items are gaps in the copper):
  pour cut-out: 3469.41,2331.18 3469.41,2228.82 3520.59,2228.82 3520.59,2331.18
  lines w15: 1000,1827 2340,1827 2340,1000 ; 1000,2818.5 2780,2818.5 2780,2630 2856,2630 ; 1000,3018.5 2989.62,3018.5 ; 1000,3565 1945,3565 1945,3870 4250,3870 4250,3055 ; 1000,3870 1475,3870 1475,4325 2770,4325 ; 1940,4325 1940,4075 2770,4075 2770,4325 ; 2989.62,2630 2989.62,3155 ; 2989.62,2818.5 4060,2818.5 4060,2060 3165,2060 3165,2200 2960,2200 ; 2990,3870 2990,3760 ; 4937.01,3055 3160,3055 3160,3155 2989.62,3155 ; 4937.01,4045 4375,4045 4375,4480 2770,4480 2770,4325 ; 2960,2200 2855,2200 2855,2630 3345,2630 3345,2455 2960,2455 2960,2200 ; 2960,3155 2960,3410 3140,3410 3140,3600 3345,3600 3345,3760 2990,3760 ; 2960,3155 2855,3155 2855,3570 2990,3570 2990,3760 ; 2960,3155 2989.62,3155 ; 2584,1326 2584,1421 2984,1421 2984,1551 3149,1551 3149,1491 3064,1491 3064,1326 2584,1326 ; 3230,4075 4060,4075 4060,4320 3230,4320 3230,4075 ; 3589,1326 4069,1326 4069,1491 4154,1491 4154,1551 3989,1551 3989,1421 3589,1421 3589,1326 ; 4409.91,1680 4582.13,1680 4582.13,2042.31 4409.91,2042.31 4409.91,1680

## Silkscreen, mask and mechanical layers (free items; w line width, h text height)
Top Overlay:
  lines w10: 3495,1925 3495,1220 4233.53,1220 4328.53,1125 4510,1125 4510,1925 3495,1925 ; 3495,1925 3495,1180 2495,1180 2495,1925 3495,1925 ; 4140,3930 4140,2965 1985,2965 1985,3930 4140,3930 ; 4140,3930 3160,3930 3160,4635 4140,4635 4140,3930 ; 1870,3930 2820,3930 2820,4515 1870,4515 1870,3930 ; 1985,2010 1985,2960 4140,2960 4140,2010 1985,2010
  text "Power Board" at 1490,4715 h100
  text "Ver.A" at 2060,4715 h72
  text "+18V" at 2440,4650 h35
  text "+19V5" at 2820,4650 h35
  text "GND" at 3255,4650 h35
  text "-18V" at 3640,4650 h35
  text "-19V5" at 4020,4650 h35
  text "Carrot" at 1490,4625 h72
  text "2023.02.14" at 1895,4625 h72
  text "+18V" at 4920,4155 h35 r90
  text "+18V" at 2575,3975 h60
  text "-18V" at 3900,3975 h60
  text "GND" at 4920,3670 h35 r90
  text "-18V" at 4920,3155 h35 r90
  text "+19V5" at 2160,3050 h60
  text "+6V5" at 4920,2650 h35 r90
  text "GND" at 4920,2170 h35 r90
  text "-19V5" at 2160,2080 h60
  text "+3V3" at 3165,1720 h60
  text "+6V5" at 4155,1715 h60
  text "+3V3" at 4920,1650 h35 r90
  text "DC24V 2A" at 1520,1050 h60 r90
  text "+3V3" at 3490,1035 h35
  text "+24V" at 3680,1035 h35
  text "GND" at 3905,1035 h35
  text "+6V5" at 4085,1035 h35
Bottom Overlay:
  text "+18V" at 1550,4265 h35
  text "G" at 1795,4265 h35
  text "-18V" at 1550,4165 h35
  text "G" at 1795,4165 h35
  text "+6V5" at 1550,4065 h35
  text "G" at 1795,4065 h35
  text "+3V3" at 1550,3965 h35
  text "G" at 1795,3965 h35
  text "G" at 1535,3865 h35
  text "G" at 1795,3865 h35
  text "G" at 1370,3500 h35
  text "G" at 1085,3498.5 h35
  text "+24V" at 1455,3400 h35
  text "G" at 1085.35,3398.5 h35
  text "+19V5" at 1485,3300 h35
  text "G" at 1085.35,3298.5 h35
  text "-19V5" at 1485,3200 h35
  text "G" at 1085.35,3198.5 h35
  text "+18V" at 1450,3100 h35
  text "G" at 1085.35,3098.5 h35
  text "-18V" at 1450,3000 h35
  text "G" at 1085.35,2998.5 h35
  text "+6V5" at 1455,2900 h35
  text "G" at 1085.35,2898.5 h35
  text "+3V3" at 1455,2800 h35
  text "G" at 1085.35,2798.5 h35
  text "G" at 1085.35,2698.5 h35
  text "+3V3" at 1441.1,2698.5 h35
  text "G" at 1370,2600 h35
  text "G" at 1085.35,2598.5 h35
Mechanical 1:
  the board outline again, w10
Mechanical 15:
  lines w1: 1940,3940 1940,4480 2770,4480 2770,3940 1940,3940 ; 3230,3940 4060,3940 4060,4480 3230,4480 3230,3940

## Text inside footprints (layer, text, board x,y; h text height)
P101: Mechanical 1 "PCB Edge" at 735.35,2528.5 h32